# Altium PCB PowerSupplyV2.PcbDoc (part 2 of 4)
Units mm, origin at the board's own origin, x right, y up, seen from the top; angles counter-clockwise.
Board outline 28.17 x 37.01 mm, 2 copper layers (Top Layer, Bottom Layer), stack 0.971 mm thick; 117 components, 81 nets, 421 pads, 118 vias.
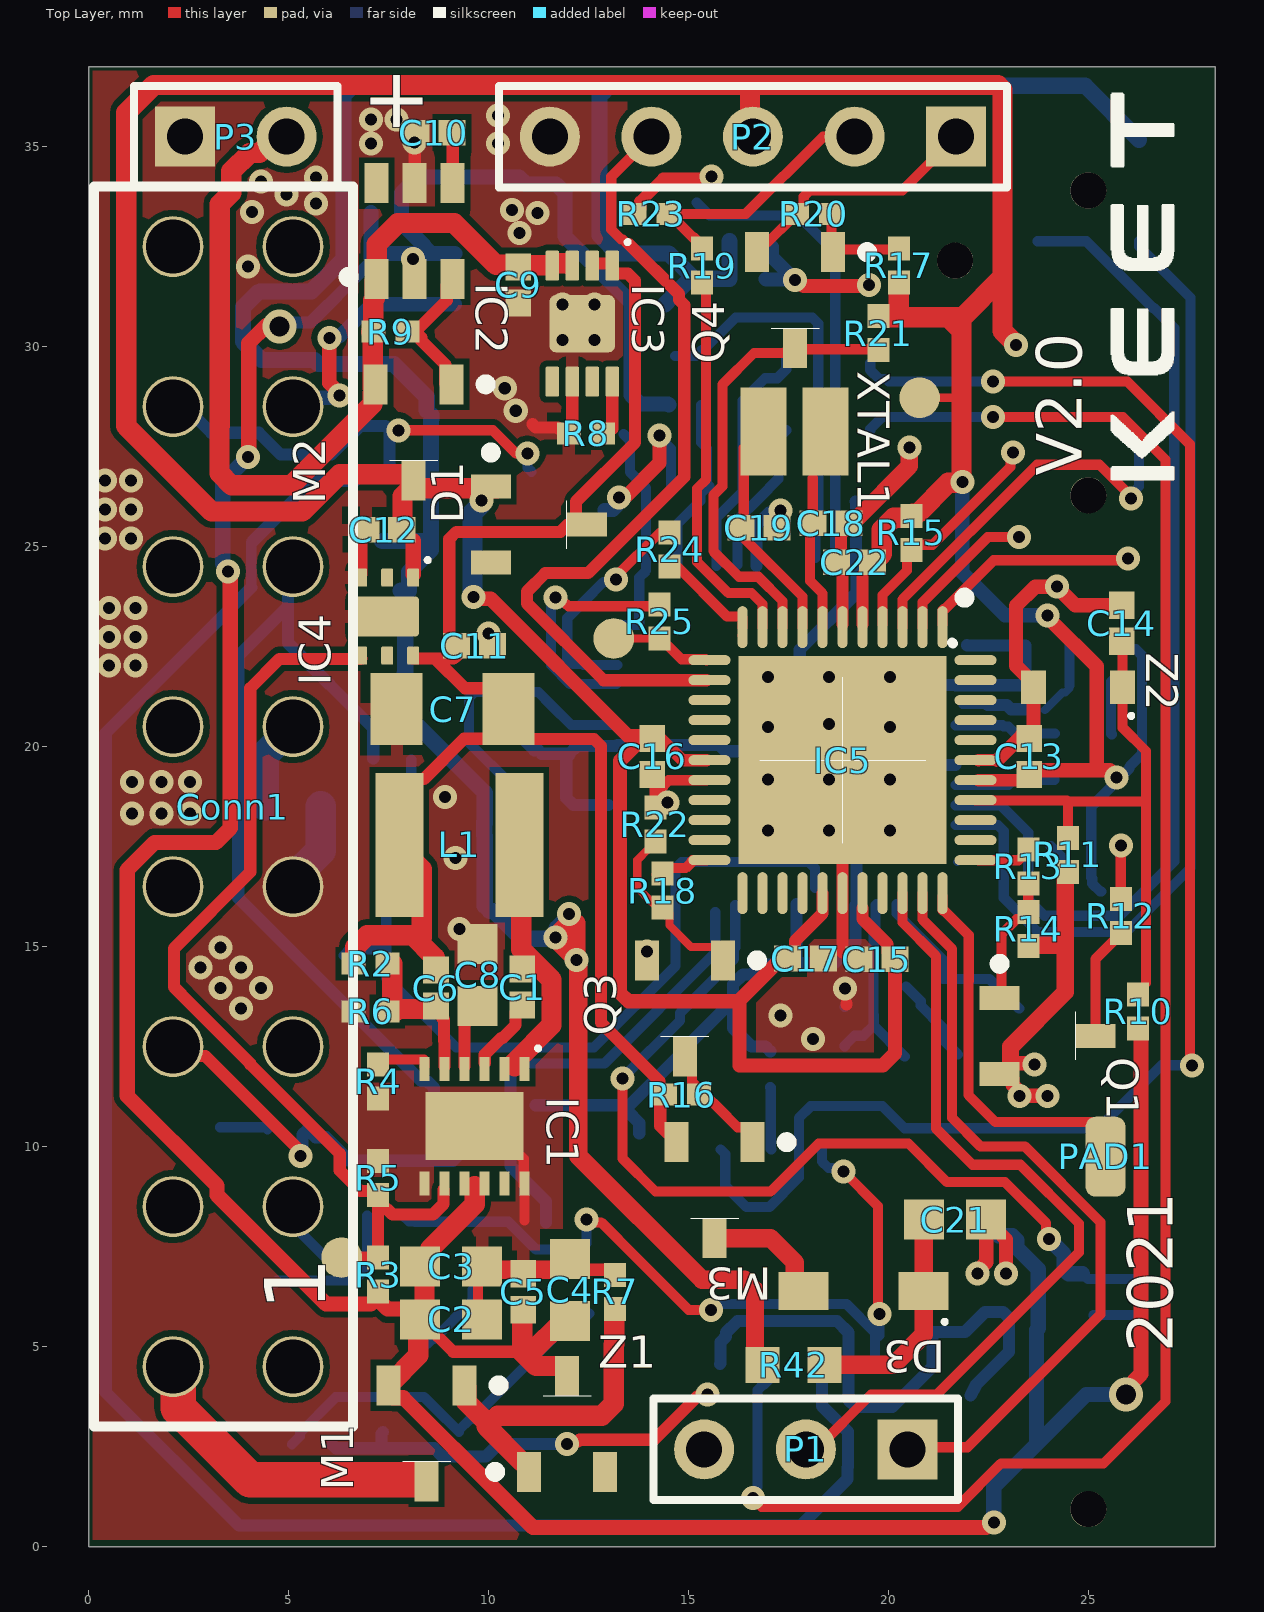
[diagram p0: Top Layer view]

## Part data (continued)
D2: library part BAT46W-7-F, "Diode Schottky 100V 0.15A 2Pin SOD123", Average Rectified Current=150mA, Forward Voltage=1V, Manufacturer=Diodes, Max Forward Surge Current (Ifsm)=750mA, Max Operating Temperature=125°C, Max Repetitive Reverse Voltage (Vrrm)=100V, Max Reverse Current=2uA, Min Operating Temperature=-55°C, Package Quantity=3000, Power Dissipation=200mW, Supplier Part Number 1=621-BAT46W-7-F, Category="Rectifier Diodes", ComponentLink1Description=https://datasheet.ciiva.com/4715/ds30044-73910-4715680.pdf?src-supplier=Mouser, ComponentLink1URL=https://datasheet.ciiva.com/4715/ds30044-73910-4715680.pdf?src-supplier=Mouser, ComponentLink2Description=https://datasheet.ciiva.com/8303/ds30044-8303137.pdf?src-supplier=Avnet, ComponentLink2URL=https://datasheet.ciiva.com/8303/ds30044-8303137.pdf?src-supplier=Avnet, ComponentLink3Description=https://datasheet.ciiva.com/6382/ds30044-6382981.pdf?src-supplier=Digi-Key, ComponentLink3URL=https://datasheet.ciiva.com/6382/ds30044-6382981.pdf?src-supplier=Digi-Key, ComponentLink4Description=https://datasheet.ciiva.com/16574/ds30044-16574286.pdf?src-supplier=Avnet+Europe, ComponentLink4URL=https://datasheet.ciiva.com/16574/ds30044-16574286.pdf?src-supplier=Avnet+Europe, ComponentLink5Description=https://datasheet.ciiva.com/16205/ds30044-16205030.pdf?src-supplier=Future+Electronics, ComponentLink5URL=https://datasheet.ciiva.com/16205/ds30044-16205030.pdf?src-supplier=Future+Electronics, ComponentLink6Description=https://datasheet.ciiva.com/22695/887886-22695798.pdf?src-supplier=Element14, ComponentLink6URL=https://datasheet.ciiva.com/22695/887886-22695798.pdf?src-supplier=Element14, ComponentLink7Description=https://datasheet.ciiva.com/6382/ds30044-6382983.pdf?src-supplier=Digi-Key, ComponentLink7URL=https://datasheet.ciiva.com/6382/ds30044-6382983.pdf?src-supplier=Digi-Key, ComponentLink8Description=https://datasheet.ciiva.com/6382/ds30044-6382985.pdf?src-supplier=Digi-Key, ComponentLink8URL=https://datasheet.ciiva.com/6382/ds30044-6382985.pdf?src-supplier=Digi-Key, ComponentLink9Description=https://datasheet.ciiva.com/15144/getdatasheetpartid-89219-15144635.pdf?src-supplier=Verical, ComponentLink9URL=https://datasheet.ciiva.com/15144/getdatasheetpartid-89219-15144635.pdf?src-supplier=Verical, ComponentLink10Description=https://datasheet.ciiva.com/1177/ds30044-1177855.pdf?src-supplier=Element14, ComponentLink10URL=https://datasheet.ciiva.com/1177/ds30044-1177855.pdf?src-supplier=Element14, Contact Plating=Tin,Matte, Element Configuration=Single, Forward Current=150mA, Height=1.25mm, Lead Free="Lead Free", Length=2.85mm, Manufacturer Part Number=BAT46W-7-F, Max Reverse Voltage (DC)=100V, Number of Pins=2, Packaging="Tape and Reel", Peak Non-Repetitive Surge Current=750mA, Power Rating=200mW, Pricing 1="1=0,370000, 10=0,245000, 50=0,245000, 100=0,133000, 1000=0,081000, 10000=0,056000 (USD)", Radiation Hardening=No, REACH SVHC="No SVHC", RoHS=Yes, RoHS Compliant=Yes, Series=-, Stock 1=53638, Supplier 1=Mouser, Weight=0.000353oz, Width=1.7mm
D3: "SCHOTTKY DIODE https://eu.mouser.com/datasheet/2/345/02ssl20l-02ssl40l-1107799.pdf"
IC1: library part LMR23615DRRR, "SIMPLE SWITCHER®, 36-V, 1.5-A Synchronous Step-Down Converter 12-SON -40 to 125", Manufacturer="Texas Instruments", Max Input Voltage=36V, Max Operating Temperature=125°C, Max Output Voltage=28V, Min Input Voltage=4V, Min Operating Temperature=-40°C, Min Output Voltage=1V, Output Current=1.5A, Supplier Part Number 1=595-LMR23615DRRR, Switching Frequency=2.425MHz, Category="Voltage Regulators - Switching", ComponentLink1Description=http://www.ti.com/lit/ds/symlink/lmr23615.pdf?src-supplier=Digi-Key, ComponentLink1URL=http://www.ti.com/lit/ds/symlink/lmr23615.pdf?src-supplier=Digi-Key, Features=UVLO, Manufacturer Part Number=LMR23615DRRR, Mount="Surface Mount", Number of Outputs=1, Output Configuration=Positive, Output Type=Adjustable, Packaging="Tape and Reel", Pricing 1="1=3,04000, 10=2,73000, 50=2,58000, 100=2,12000, 1000=1,53000, 10000=1,47000 (USD)", RoHS=Yes, RoHS Compliant=Yes, Stock 1=2047, Supplier 1=Mouser, Synchronous Rectifier=Yes
IC2: "Voltage detector", Case/Package=SOT-23-6, Manufacturer="ABLIC U.S.A.", Max Operating Temperature=85°C, Min Operating Temperature=-40°C, Number of Voltages Monitored=1, Supplier Part Number 1=628-S-1011EA0-M6T1U4, Threshold Voltage=10V, Category="Voltage Supervisors", ComponentLink1Description=https://www.ablic.com/en/doc/datasheet/voltage_detector/S1011_E.pdf?src-supplier=Digi-Key, ComponentLink1URL=https://www.ablic.com/en/doc/datasheet/voltage_detector/S1011_E.pdf?src-supplier=Digi-Key, Manufacturer Part Number=S-1011EA0-M6T1U4, Mount="Surface Mount", Packaging="Tape and Reel", Pricing 1="1=0,99000, 10=0,88300, 50=0,88300, 100=0,60400, 1000=0,41900, 10000=0,37000 (USD)", Reset="Active Low", RoHS=No, Stock 1=20, Supplier 1=Mouser, Type="Voltage Detector"
IC3: library part MCP73831T-2ACI/MC, "IC CONTROLLER LI-ION 4.2V 8DFN", Case/Package=DFN, Manufacturer=Microchip, Max Input Voltage=7V, Max Operating Temperature=85°C, Max Supply Voltage=6V, Min Operating Temperature=-40°C, Min Supply Voltage=3.75V, Operating Supply Current=510uA, Output Current=500mA, Output Voltage=4.2V, Package Quantity=3300, Supplier Part Number 1=579-MCP73831T-2ACIMC, Category="Battery Management", ComponentLink1Description=https://datasheet.ciiva.com/16466/21984e-16466086.pdf?src-supplier=Avnet+Asia, ComponentLink1URL=https://datasheet.ciiva.com/16466/21984e-16466086.pdf?src-supplier=Avnet+Asia, ComponentLink2Description=https://datasheet.ciiva.com/1933/21984e-1933405.pdf?src-supplier=Digi-Key, ComponentLink2URL=https://datasheet.ciiva.com/1933/21984e-1933405.pdf?src-supplier=Digi-Key, Contact Plating=Tin,Matte, Lead Free="Lead Free", Manufacturer Part Number=MCP73831T-2ACI/MC, Mount="Surface Mount", Number Of Channels=1, Number of Pins=8, Packaging="Tape and Reel", Pricing 1="1=0,62000, 10=0,62000, 50=0,51000, 100=0,47000, 1000=0,47000, 10000=0,47000 (USD)", Radiation Hardening=No, RoHS=Yes, RoHS Compliant=Yes, Series=MCP73831, Stock 1=5377, Supplier 1=Mouser
IC4: library part TLV75740PDRVR, "1-A, low-IQ, high-accuracy, low-dropout voltage regulator with enable 6-WSON -40 to 125", Manufacturer="Texas Instruments", Max Operating Temperature=125°C, Min Operating Temperature=-40°C, Supplier Part Number 1=595-TLV75740PDRVR, Category="Integrated Circuits (ICs)", ComponentLink1Description=http://www.ti.com/general/docs/suppproductinfo.tsp?distId=10&amp;gotoUrl=http%3A%2F%2Fwww.ti.com%2Flit%2Fgpn%2Ftlv757p&src-supplier=Digi-Key, ComponentLink1URL=http://www.ti.com/general/docs/suppproductinfo.tsp?distId=10&amp;gotoUrl=http%3A%2F%2Fwww.ti.com%2Flit%2Fgpn%2Ftlv757p&src-supplier=Digi-Key, Manufacturer Part Number=TLV75740PDRVR, Pricing 1="1=0,62000, 10=0,49000, 50=0,49000, 100=0,36400, 1000=0,21700, 10000=0,18000 (USD)", RoHS=Yes, RoHS Compliant=Yes, Stock 1=5343, Supplier 1=Mouser
IC5: library part ATMEGA1284P-MU, "MCU 8-bit ATmega AVR RISC 128KB Flash 2.5V/3.3V/5V 44-Pin VQFN EP", Case/Package="VQFN EP", Frequency=20MHz, Manufacturer="Microchip / Atmel", Max Operating Temperature=85°C, Max Supply Voltage=5.5V, Min Operating Temperature=-40°C, Min Supply Voltage=1.8V, Package Quantity=360, Supplier Part Number 1=556-ATMEGA1284P-MU, Category=Microcontrollers, ComponentLink1Description=https://datasheet.ciiva.com/4839/doc8272-71643-4839072.pdf?src-supplier=Mouser, ComponentLink1URL=https://datasheet.ciiva.com/4839/doc8272-71643-4839072.pdf?src-supplier=Mouser, ComponentLink2Description=https://datasheet.ciiva.com/26818/atmega1284p-mu-26818543.pdf?src-supplier=IIIC, ComponentLink2URL=https://datasheet.ciiva.com/26818/atmega1284p-mu-26818543.pdf?src-supplier=IIIC, ComponentLink3Description=https://datasheet.ciiva.com/9235/doc8272-9235016.pdf?src-supplier=Avnet, ComponentLink3URL=https://datasheet.ciiva.com/9235/doc8272-9235016.pdf?src-supplier=Avnet, ComponentLink4Description=https://datasheet.ciiva.com/1157/1712449-1157226.pdf?src-supplier=Element14, ComponentLink4URL=https://datasheet.ciiva.com/1157/1712449-1157226.pdf?src-supplier=Element14, ComponentLink5Description=https://datasheet.ciiva.com/24154/doc8272-24154058.pdf?src-supplier=Future+Electronics, ComponentLink5URL=https://datasheet.ciiva.com/24154/doc8272-24154058.pdf?src-supplier=Future+Electronics, ComponentLink6Description=https://datasheet.ciiva.com/15213/getdatasheetpartid-187398-15213067.pdf?src-supplier=Verical, ComponentLink6URL=https://datasheet.ciiva.com/15213/getdatasheetpartid-187398-15213067.pdf?src-supplier=Verical, Contact Plating=Tin,Matte, Core Architecture=AVR, Data Bus Width=8b, Height=0.95mm, Interface=SPI,USART,2-Wire,I2C,UART, Lead Free="Lead Free", Length=7.1mm, Manufacturer Part Number=ATMEGA1284P-MU, Max Frequency=20MHz, Memory Size=128KB, Memory Type=FLASH, Mount="Surface Mount", Number of ADC Channels=8, Number of I2C Channels=1, Number of I/Os=32, Number of Pins=44, Number of Programmable I/O=32, Number of PWM Channels=6, Number of SPI Channels=1, Number of Timers/Counters=3, Oscillator Type=Internal, Packaging=Tray, Peripherals="Brown-out Detect/Reset,POR,PWM,WDT", Pricing 1="1=5,55000, 10=5,55000, 50=5,09000, 100=4,61000, 1000=4,61000, 10000=4,61000 (USD)", Radiation Hardening=No, RAM Size=16KB, REACH SVHC="No SVHC", RoHS=Yes, RoHS Compliant=Yes, Series="AVR® ATmega", Stock 1=90, Supplier 1=Mouser, Watchdog Timer=Yes, Width=7.1mm
IC6: library part LPC1517JBD48E, "IC MCU 32BIT 64KB FLASH 48LQFP", Case/Package=LQFP, Frequency=72MHz, Manufacturer="NXP Semiconductors", Max Operating Temperature=105°C, Max Power Dissipation=1.5W, Max Supply Voltage=3.6V, Min Operating Temperature=-40°C, Min Supply Voltage=2.4V, Operating Supply Voltage=3.3V, Package Quantity=250, Supplier Part Number 1=771-LPC1517JBD48E, Category=Microcontrollers, ComponentLink1Description=https://datasheet.ciiva.com/29718/lpc15xx-29718830.pdf?src-supplier=Digi-Key, ComponentLink1URL=https://datasheet.ciiva.com/29718/lpc15xx-29718830.pdf?src-supplier=Digi-Key, Core Architecture=ARM, Data Bus Width=32b, Interface=I2C,SPI,CAN,USART,UART, Lead Free="Lead Free", Manufacturer Part Number=LPC1517JBD48E, Max Frequency=72MHz, Memory Size=64KB, Memory Type=FLASH, Mount="Surface Mount", Number of ADC Channels=16, Number of I/Os=32, Number of Pins=48, Number of Programmable I/O=32, Number of Timers/Counters=4, Oscillator Type=Internal, Packaging=Tray, Peripherals="Brown-out Detect/Reset,POR,PWM,WDT,DMA", Pricing 1="1=5,33000, 10=4,52000, 50=4,52000, 100=3,72000, 1000=2,81000, 10000=2,81000 (USD)", Radiation Hardening=No, RAM Size=12KB, REACH SVHC="No SVHC", RoHS=Yes, RoHS Compliant=Yes, Supplier 1=Mouser, Watchdog Timer=Yes, Weight=6.287584oz
IC7: library part TJF1051T/3,118, "IC CAN TRANSEIVER HS 8SOIC", Case/Package=SO, Manufacturer="NXP Semiconductors", Max Operating Temperature=85°C, Max Supply Voltage=5.5V, Min Operating Temperature=-40°C, Min Supply Voltage=4.5V, Nominal Supply Current=70mA, Operating Supply Voltage=5V, Package Quantity=2500, Supplier Part Number 1=771-TJF1051T3118, Category="Interface ICs", ComponentLink1Description=https://datasheet.ciiva.com/1767/tjf1051-1767282.pdf?src-supplier=Digi-Key, ComponentLink1URL=https://datasheet.ciiva.com/1767/tjf1051-1767282.pdf?src-supplier=Digi-Key, ComponentLink2Description=https://datasheet.ciiva.com/11212/tjf1051-11212991.pdf?src-supplier=Avnet, ComponentLink2URL=https://datasheet.ciiva.com/11212/tjf1051-11212991.pdf?src-supplier=Avnet, Data Rate=1Mbps, Lead Free="Lead Free", Manufacturer Part Number=TJF1051T/3,118, Mount="Surface Mount", Number of Pins=8, Number of Transceivers=1, Number of Transmitters=1, Packaging="Tape and Reel", Pricing 1="1=1,03000, 10=0,87100, 50=0,87100, 100=0,59200, 1000=0,43600, 10000=0,41300 (USD)", Propagation Delay=220ns, Radiation Hardening=No, Receiver Hysteresis=120mV, RoHS=Yes, RoHS Compliant=Yes, Series=-, Simplex/Duplex="Half Duplex", Supplier 1=Mouser, Supply Current=70mA, Turn-On Delay Time=220ns
IC8: library part AP7313-33SRG-7, "IC REG LIN 3.3V 150MA SOT23R-3", Case/Package=TO-236-3, Dropout Voltage=150mV, Manufacturer=Diodes, Max Input Voltage=6V, Max Operating Temperature=85°C, Max Output Current=150mA, Max Power Dissipation=600mW, Min Current Limit=200mA, Min Input Voltage=2V, Min Operating Temperature=-40°C, Min Output Voltage=3.3V, Package Quantity=3000, Power Dissipation=540W, Quiescent Current=75uA, Supplier Part Number 1=621-AP7313-33SRG-7, Accuracy=2%, Category="Voltage Regulators - Linear", ComponentLink1Description=https://datasheet.ciiva.com/26856/getdatasheetpartid-656981-26856375.pdf?src-supplier=Verical, ComponentLink1URL=https://datasheet.ciiva.com/26856/getdatasheetpartid-656981-26856375.pdf?src-supplier=Verical, ComponentLink2Description=https://datasheet.ciiva.com/16415/ap7313-16415567.pdf?src-supplier=Future+Electronics, ComponentLink2URL=https://datasheet.ciiva.com/16415/ap7313-16415567.pdf?src-supplier=Future+Electronics, Height=1mm, Lead Free="Lead Free", Length=3mm, Manufacturer Part Number=AP7313-33SRG-7, Mount="Surface Mount", Number of Outputs=1, Number of Pins=3, Number of Regulators=1, Output Current=150mA, Output Type=Fixed, Output Voltage=3.3V, Packaging="Tape and Reel", Polarity=Positive, Pricing 1="1=0,35000, 10=0,26100, 50=0,26100, 100=0,13400, 1000=0,10000, 10000=0,10000 (USD)", Radiation Hardening=No, REACH SVHC="No SVHC", RoHS=Yes, RoHS Compliant=Yes, Series=AP7313, Stock 1=3794, Supplier 1=Mouser, Weight=0.000282oz, Width=1.4mm
IC9: library part TLV76050DBZT, "IC REG LINEAR 5V 100MA SOT23-3", Case/Package=TO-236-3, Dropout Voltage=1.1V, Manufacturer="Texas Instruments", Max Input Voltage=30V, Max Operating Temperature=125°C, Min Operating Temperature=-40°C, Output Current=100mA, Quiescent Current=5mA, Supplier Part Number 1=595-TLV76050DBZT, Category="Voltage Regulators - Linear", ComponentLink1Description=http://www.ti.com/general/docs/lit/getliterature.tsp?genericPartNumber=TLV760&fileType=pdf&src-supplier=Farnell, ComponentLink1URL=http://www.ti.com/general/docs/lit/getliterature.tsp?genericPartNumber=TLV760&fileType=pdf&src-supplier=Farnell, ComponentLink2Description=http://www.ti.com/lit/ds/symlink/tlv760.pdf?src-supplier=Digi-Key, ComponentLink2URL=http://www.ti.com/lit/ds/symlink/tlv760.pdf?src-supplier=Digi-Key, Manufacturer Part Number=TLV76050DBZT, Min Output Voltage=5V, Mount="Surface Mount", Number of Regulators=1, Output Configuration=Positive, Output Type=Fixed, Packaging="Tape and Reel", RoHS=Yes, RoHS Compliant=Yes, Supplier 1=Mouser
IC10: library part LM393D, "TEXAS INSTRUMENTS - LM393D - COMPARATOR DUAL, SMD, SOIC8, 393", Case/Package=SOIC, Dual Supply Voltage=9V, Input Bias Current=250nA, Input Offset Voltage (Vos)=5mV, Manufacturer="Texas Instruments", Max Dual Supply Voltage=18V, Max Operating Temperature=70°C, Max Supply Current=500uA, Max Supply Voltage=36V, Min Dual Supply Voltage=1V, Min Operating Temperature=0°C, Min Supply Voltage=2V, Nominal Supply Current=1mA, Operating Supply Voltage=28V, Output Current=20mA, Output Current Per Channel=6mA, Package Quantity=75, Quiescent Current=2.5mA, Supplier Part Number 1=595-LM393D, Voltage Gain=106.02dB, Category="Amplifiers - Op Amps, Buffer, Instrumentation", ComponentLink1Description=https://datasheet.ciiva.com/15131/getdatasheetpartid-248499-15131100.pdf?src-supplier=Verical, ComponentLink1URL=https://datasheet.ciiva.com/15131/getdatasheetpartid-248499-15131100.pdf?src-supplier=Verical, ComponentLink2Description=https://datasheet.ciiva.com/2970/lm2903-2970514.pdf?src-supplier=Avnet, ComponentLink2URL=https://datasheet.ciiva.com/2970/lm2903-2970514.pdf?src-supplier=Avnet, ComponentLink3Description=https://datasheet.ciiva.com/1827/lm193-1827528.pdf?src-supplier=Digi-Key, ComponentLink3URL=https://datasheet.ciiva.com/1827/lm193-1827528.pdf?src-supplier=Digi-Key, ComponentLink4Description=https://datasheet.ciiva.com/1483/1633629-1483065.pdf?src-supplier=Element14, ComponentLink4URL=https://datasheet.ciiva.com/1483/1633629-1483065.pdf?src-supplier=Element14, ComponentLink5Description=https://datasheet.ciiva.com/16464/lm2903-16464313.pdf?src-supplier=Avnet+Asia, ComponentLink5URL=https://datasheet.ciiva.com/16464/lm2903-16464313.pdf?src-supplier=Avnet+Asia, Contact Plating=Gold, Height=1.58mm, Lead Free="Lead Free", Length=4.9mm, Manufacturer Part Number=LM393D, Mount="Surface Mount", Number Of Channels=2, Number of Elements=2, Number of Pins=8, Output Type=TTL, Packaging=Rail/Tube, Pricing 1="1=0,44000, 10=0,32700, 50=0,32700, 100=0,18200, 1000=0,12500, 10000=0,11700 (USD)", Radiation Hardening=No, REACH SVHC="No SVHC", Response Time=0.3us, RoHS=Yes, RoHS Compliant=Yes, Stock 1=7555, Supplier 1=Mouser, Weight=0.002561oz, Width=3.91mm
L1: library part IFSC1515AHER4R7M01, "Inductor Power Shielded Wirewound 4.7uH 20% 100KHz 2.2A 90mOhm DCR 1515 T/R", Case/Package=1515, Current Rating=2.2A, DC Resistance (DCR)=90mR, Inductance=4.7uH, Inductance Tolerance=20%, Manufacturer="Vishay Dale", Max DC Current=2A, Max Operating Temperature=125°C, Min Operating Temperature=-55°C, Package Quantity=2000, Supplier Part Number 1=70-IFSC1515AHER4R7M0, Test Frequency=100kHz, Category="Fixed Inductors", ComponentLink1Description=https://datasheet.ciiva.com/1049/sc15ah01-1049410.pdf?src-supplier=Digi-Key, ComponentLink1URL=https://datasheet.ciiva.com/1049/sc15ah01-1049410.pdf?src-supplier=Digi-Key, ComponentLink2Description=https://datasheet.ciiva.com/1049/sc15ah01-1049411.pdf?src-supplier=Digi-Key, ComponentLink2URL=https://datasheet.ciiva.com/1049/sc15ah01-1049411.pdf?src-supplier=Digi-Key, ComponentLink3Description=https://datasheet.ciiva.com/1049/sc15ah01-1049412.pdf?src-supplier=Digi-Key, ComponentLink3URL=https://datasheet.ciiva.com/1049/sc15ah01-1049412.pdf?src-supplier=Digi-Key, ComponentLink4Description=https://datasheet.ciiva.com/46395/1913058-46395302.pdf?src-supplier=Element14, ComponentLink4URL=https://datasheet.ciiva.com/46395/1913058-46395302.pdf?src-supplier=Element14, ComponentLink5Description=https://datasheet.ciiva.com/8494/sc15ah01-8494793.pdf?src-supplier=Avnet, ComponentLink5URL=https://datasheet.ciiva.com/8494/sc15ah01-8494793.pdf?src-supplier=Avnet, ComponentLink6Description=https://datasheet.ciiva.com/8017/sc15ah01-8017548.pdf?src-supplier=Element14, ComponentLink6URL=https://datasheet.ciiva.com/8017/sc15ah01-8017548.pdf?src-supplier=Element14, ComponentLink7Description=https://datasheet.ciiva.com/22726/1730404-22726061.pdf?src-supplier=Element14, ComponentLink7URL=https://datasheet.ciiva.com/22726/1730404-22726061.pdf?src-supplier=Element14, Depth=4mm, Height=1.8mm, Height - Seated (Max)=0.075inch, Lead Free="Lead Free", Length=0.15inch, Manufacturer Part Number=IFSC1515AHER4R7M01, Military Standard=Not, Mount="Surface Mount", Number of Pins=2, Packaging="Tape and Reel", Pricing 1="1=0,64000, 10=0,55900, 50=0,55900, 100=0,33500, 1000=0,26800, 10000=0,20300 (USD)", REACH SVHC=Unknown, RMS Current (Irms)=2.2A, RoHS=Yes, RoHS Compliant=Yes, Saturation Current=2A, Series=IFSC-1515AH-01, Shielding=Shielded, Stock 1=16855, Supplier 1=Mouser, Termination=SMD/SMT, Tolerance=20%, Width=0.15inch
LED1: library part 150060RS75000, "WURTH ELEKTRONIK - 150060RS75000 - LED, Red, 625 nm, 2 V, 30 mA, 250 mcd RoHS Compliant: Yes", Case Code (Imperial)=0603, Case Code (Metric)=1608, Color=Red, Forward Current=30mA, Forward Voltage=2V, Manufacturer="Wurth Electronics", Max Operating Temperature=85°C, Min Operating Temperature=-40°C, Package Quantity=1, Supplier Part Number 1=710-150060RS75000, Test Current=20mA, Case/Package=0603, Category=LEDs, ComponentLink1Description=https://datasheet.ciiva.com/29563/150060rs75000-29563040.pdf?src-supplier=Digi-Key, ComponentLink1URL=https://datasheet.ciiva.com/29563/150060rs75000-29563040.pdf?src-supplier=Digi-Key, ComponentLink2Description=https://datasheet.ciiva.com/29279/759428-da-01-en-chipled-0603-w-kl-rot-150060rs75000-29279196.pdf?src-supplier=Conrad, ComponentLink2URL=https://datasheet.ciiva.com/29279/759428-da-01-en-chipled-0603-w-kl-rot-150060rs75000-29279196.pdf?src-supplier=Conrad, Dominant Wavelength=625nm, Height=0.7mm, Length=1.6mm, Lens Style=Clear,Rectangular, Luminous Intensity=250mcd, Manufacturer Part Number=150060RS75000, Mount="Surface Mount", Packaging="Cut Tape", Pricing 1="1=0,15000, 10=0,15000, 50=0,13300, 100=0,11400, 1000=0,10600, 10000=0,10600 (USD)", REACH SVHC=Unknown, RoHS=Yes, RoHS Compliant=Yes, Stock 1=64382, Supplier 1=Mouser, Viewing Angle=140°, Wavelength=625nm, Width=0.8mm
LED2: library part HSMS-C190, "AVAGO TECHNOLOGIES - HSMS-C190 - LED, RED, 10MCD, 626NM", Case Code (Imperial)=0603, Case Code (Metric)=1608, Color=Red, Forward Current=20mA, Forward Voltage=2.1V, Lens Color=White, Manufacturer="Broadcom Avago", Max Operating Temperature=85°C, Min Operating Temperature=-40°C, Package Quantity=4000, Power Dissipation=52mW, Reverse Voltage=5V, Supplier Part Number 1=630-HSMS-C190, Case/Package=0603, Category=LEDs, Depth=0.8mm, Dominant Wavelength=626nm, Height=0.8mm, Illumination Color=Red, Lead Free="Lead Free", Length=1.6mm, Lens Style=Diffused,Colorless,Rectangular, Lens Transparency=Diffused, Luminous Intensity=10mcd, Manufacturer Part Number=HSMS-C190, Mount="Surface Mount", Number of Elements=1, Number of LEDs=1, Number of Pins=2, Packaging="Tape and Reel", Power Rating=52mW, Pricing 1="1=0,41000, 10=0,28800, 50=0,28800, 100=0,12800, 1000=0,09400, 10000=0,06400 (USD)", Radiation Hardening=No, REACH SVHC="No SVHC", RoHS=Yes, RoHS Compliant=Yes, Series=-, Stock 1=51818, Supplier 1=Mouser, Test Current=20mA, Viewing Angle=170°, Wavelength=626nm, Width=0.8mm
LED3: library part HSMY-C190, "LED, YELLOW, 8MCD, 586NM; LED Colour:Yellow; Bulb Size:-; Wavelength Typ:586nm; Forward Voltage:2.1V; Forward Current If:20mA; Luminous Intensity:8mcd; LED Mounting:SMD; Lens Shape:Rectangular; Viewing Angle:170 ; Packaging:Cut Tape;;RoHS Compliant: Yes", Case Code (Imperial)=0603, Case Code (Metric)=1608, Forward Current=20mA, Forward Voltage=2.1V, Lens Color=White, Manufacturer="Broadcom Avago", Max Operating Temperature=85°C, Max Power Dissipation=52mW, Min Operating Temperature=-40°C, Package Quantity=1, Reverse Voltage=5V, Supplier Part Number 1=630-HSMY-C190, Case/Package=0603, Category=LEDs, Color=Yellow, ComponentLink1Description=https://datasheet.ciiva.com/34302/1557097-34302483.pdf?src-supplier=Jameco, ComponentLink1URL=https://datasheet.ciiva.com/34302/1557097-34302483.pdf?src-supplier=Jameco, ComponentLink2Description=https://datasheet.ciiva.com/15117/getdatasheetpartid-118294-15117593.pdf?src-supplier=Verical, ComponentLink2URL=https://datasheet.ciiva.com/15117/getdatasheetpartid-118294-15117593.pdf?src-supplier=Verical, ComponentLink3Description=https://datasheet.ciiva.com/11774/0900766b80ad69c9-11774266.pdf?src-supplier=RSComponents, ComponentLink3URL=https://datasheet.ciiva.com/11774/0900766b80ad69c9-11774266.pdf?src-supplier=RSComponents, ComponentLink4Description=https://datasheet.ciiva.com/29280/180660-da-01-en-chip-led-hsmy-c190-gelb-29280613.pdf?src-supplier=Conrad, ComponentLink4URL=https://datasheet.ciiva.com/29280/180660-da-01-en-chip-led-hsmy-c190-gelb-29280613.pdf?src-supplier=Conrad, ComponentLink5Description=https://datasheet.ciiva.com/14172/swseriehsmx-c150toc190-e-14172172.pdf?src-supplier=Distrelec, ComponentLink5URL=https://datasheet.ciiva.com/14172/swseriehsmx-c150toc190-e-14172172.pdf?src-supplier=Distrelec, Contact Plating=Gold, Depth=0.8mm, Dominant Wavelength=586nm, Height=0.8mm, Illumination Color=Yellow, Lead Free="Lead Free", Length=1.6mm, Lens Style=Rectangular,Untinted,Diffused,Colorless, Lens Transparency=Diffused, Luminous Intensity=8mcd, Manufacturer Part Number=HSMY-C190, Mount="Surface Mount", Number of Elements=1, Number of LEDs=1, Number of Pins=2, Number of Terminals/Pins=2, Packaging="Tape and Reel", Power Dissipation=52mW, Power Rating=52mW, Pricing 1="1=0,41000, 10=0,28800, 50=0,28800, 100=0,12800, 1000=0,09400, 10000=0,06400 (USD)", Radiation Hardening=No, REACH SVHC="No SVHC", RoHS=Yes, RoHS Compliant=Yes, Series=-, Shape=Rectangular, Stock 1=44023, Supplier 1=Mouser, Test Current=20mA, Viewing Angle=170°, Wavelength=586nm, Width=0.8mm
M1: library part DMPH6250SQ-7, "DMPH6250SQ Series 60 V 2.4 A P-Channel Enhancement Mode Mosfet - SOT-23-3", Manufacturer=Diodes, Supplier Part Number 1=621-DMPH6250SQ-7, Manufacturer Part Number=DMPH6250SQ-7, Pricing 1="1=0,40000, 10=0,31900, 50=0,31900, 100=0,22500, 1000=0,15100, 10000=0,13000 (USD)", RoHS=Yes, Supplier 1=Mouser
M2 M3: library part DMP1045U-7, "P-Channel 12 V 31 mOhm Surface Mount Enhancement Mode Mosfet - SOT-23-3", Case/Package=SOT-23, Continuous Drain Current (ID)=4A, Drain To Source Breakdown Voltage=-12V, Drain To Source Resistance=31mR, Drain to Source Voltage (Vdss)=12V, Gate to Source Voltage (Vgs)=8V, Input Capacitance=1.357nF, Manufacturer=Diodes, Max Operating Temperature=150°C, Max Power Dissipation=800mW, Min Operating Temperature=-55°C, Package Quantity=3000, Power Dissipation=1.3W, Supplier Part Number 1=621-DMP1045U-7, Category=MOSFETs, ComponentLink1Description=https://datasheet.ciiva.com/11176/dmp1045u-11176581.pdf?src-supplier=Avnet, ComponentLink1URL=https://datasheet.ciiva.com/11176/dmp1045u-11176581.pdf?src-supplier=Avnet, ComponentLink2Description=https://datasheet.ciiva.com/17323/dmp1045u-17323644.pdf?src-supplier=Avnet+Europe, ComponentLink2URL=https://datasheet.ciiva.com/17323/dmp1045u-17323644.pdf?src-supplier=Avnet+Europe, ComponentLink3Description=https://datasheet.ciiva.com/18648/dmp1045u-18648300.pdf?src-supplier=Digi-Key, ComponentLink3URL=https://datasheet.ciiva.com/18648/dmp1045u-18648300.pdf?src-supplier=Digi-Key, Contact Plating=Tin,Matte, Element Configuration=Single, Fall Time=106.9ns, Height=1.1mm, Lead Free="Lead Free", Length=3mm, Manufacturer Part Number=DMP1045U-7, Mount="Surface Mount", Number Of Channels=1, Number of Elements=1, Number of Pins=3, Packaging="Tape and Reel", Polarity=P-CHANNEL, Pricing 1="1=0,41000, 10=0,27800, 50=0,27800, 100=0,14500, 1000=0,10100, 10000=0,07800 (USD)", Radiation Hardening=No, Rds On Max=31mR, REACH SVHC="No SVHC", Rise Time=23.3ns, RoHS=Yes, RoHS Compliant=Yes, Series=DMP1045, Stock 1=8272, Supplier 1=Mouser, Turn-Off Delay Time=91.2ns, Turn-On Delay Time=15.7ns, Weight=0.000282oz, Width=1.4mm
P1: "Header, 3-Pin", LatestRevisionDate=17-Jul-2002, LatestRevisionNote="Re-released for DXP Platform.", Publisher="Altium Limited"
P2: "Header, 5-Pin", LatestRevisionDate=17-Jul-2002, LatestRevisionNote="Re-released for DXP Platform.", Publisher="Altium Limited"
P3: "Header, 2-Pin", LatestRevisionDate=17-Jul-2002, LatestRevisionNote="Re-released for DXP Platform.", Publisher="Altium Limited"
PAD1: library part PAD, "just a pad"
pogo1: "pad layout for external pogo connector"
Q1 Q3 Q4: library part BC850CLT1G, "ON SEMICONDUCTOR   BC850CLT1G   BIPOLAR TRANSISTOR, NPN, 45V SOT-23", Case/Package=SOT-23-3, Collector Base Voltage (VCBO)=50V, Collector Emitter Breakdown Voltage=45V, Collector Emitter Saturation Voltage=600mV, Current Rating=100mA, Emitter Base Voltage (VEBO)=6V, Frequency=100MHz, Manufacturer="ON Semiconductor", Max Operating Temperature=150°C, Max Power Dissipation=225mW, Min Operating Temperature=-55°C, Package Quantity=1, Power Dissipation=300mW, Supplier Part Number 1=863-BC850CLT1G, Category=BJTs, Collector Emitter Voltage (VCEO)=45V, Collector-emitter Voltage-Max=600mV, ComponentLink1Description=https://datasheet.ciiva.com/976/bc846alt1-d-976401.pdf?src-supplier=Digi-Key, ComponentLink1URL=https://datasheet.ciiva.com/976/bc846alt1-d-976401.pdf?src-supplier=Digi-Key, ComponentLink2Description=https://datasheet.ciiva.com/976/bc846alt1-d-976402.pdf?src-supplier=Digi-Key, ComponentLink2URL=https://datasheet.ciiva.com/976/bc846alt1-d-976402.pdf?src-supplier=Digi-Key, ComponentLink3Description=https://datasheet.ciiva.com/976/bc846alt1-d-976403.pdf?src-supplier=Digi-Key, ComponentLink3URL=https://datasheet.ciiva.com/976/bc846alt1-d-976403.pdf?src-supplier=Digi-Key, ComponentLink4Description=https://datasheet.ciiva.com/7971/1571861-7971973.pdf?src-supplier=Element14, ComponentLink4URL=https://datasheet.ciiva.com/7971/1571861-7971973.pdf?src-supplier=Element14, ComponentLink5Description=https://datasheet.ciiva.com/11204/bc846alt1-d-11204376.pdf?src-supplier=Avnet, ComponentLink5URL=https://datasheet.ciiva.com/11204/bc846alt1-d-11204376.pdf?src-supplier=Avnet, ComponentLink6Description=https://datasheet.ciiva.com/25997/bc846alt1-d-25997003.pdf?src-supplier=Avnet+Europe, ComponentLink6URL=https://datasheet.ciiva.com/25997/bc846alt1-d-25997003.pdf?src-supplier=Avnet+Europe, ComponentLink7Description=https://datasheet.ciiva.com/7972/bc846alt1-d-7972206.pdf?src-supplier=Element14, ComponentLink7URL=https://datasheet.ciiva.com/7972/bc846alt1-d-7972206.pdf?src-supplier=Element14, ComponentLink8Description=https://datasheet.ciiva.com/16291/bc846alt1-d-16291503.pdf?src-supplier=Future+Electronics, ComponentLink8URL=https://datasheet.ciiva.com/16291/bc846alt1-d-16291503.pdf?src-supplier=Future+Electronics, Contact Plating=Tin,Matte, Element Configuration=Single, Gain Bandwidth Product=100MHz, Height=0.94mm, hFE Min=420, Lead Free="Lead Free", Length=2.9mm, Manufacturer Part Number=BC850CLT1G, Max Breakdown Voltage=45V, Max Collector Current=100mA, Max Frequency=100MHz, Number of Elements=1, Number of Pins=3, Packaging="Tape and Reel", Polarity=NPN, Pricing 1="1=0,11000, 10=0,09800, 50=0,09800, 100=0,03400, 1000=0,02400, 10000=0,01500 (USD)", Radiation Hardening=No, REACH SVHC="No SVHC", RoHS=Yes, RoHS Compliant=Yes, Series=-, Stock 1=123785, Supplier 1=Mouser, Transition Frequency=100MHz, Voltage Rating (DC)=45V, Width=1.3mm
Q2 Q6: library part BSS138, "Trans MOSFET N-CH 50V 0.22A 3-Pin SOT-23 T/R", Case/Package=SOT-23, Continuous Drain Current (ID)=220mA, Drain To Source Breakdown Voltage=50V, Drain To Source Resistance=3.5R, Gate to Source Voltage (Vgs)=20V, Input Capacitance=27pF, Manufacturer="ON Semiconductor / Fairchild", Max Operating Temperature=150°C, Max Power Dissipation=360mW, Min Operating Temperature=-55°C, On-State Resistance=6R, Package Quantity=1, Supplier Part Number 1=512-BSS138, Threshold Voltage=1.3V, Category=MOSFETs, ComponentLink1Description=https://datasheet.ciiva.com/1190/193736-1190130.pdf?src-supplier=Element14, ComponentLink1URL=https://datasheet.ciiva.com/1190/193736-1190130.pdf?src-supplier=Element14, ComponentLink2Description=https://datasheet.ciiva.com/931/bss138-931776.pdf?src-supplier=Digi-Key, ComponentLink2URL=https://datasheet.ciiva.com/931/bss138-931776.pdf?src-supplier=Digi-Key, ComponentLink3Description=https://datasheet.ciiva.com/1190/193736-1190131.pdf?src-supplier=Element14, ComponentLink3URL=https://datasheet.ciiva.com/1190/193736-1190131.pdf?src-supplier=Element14, ComponentLink4Description=https://datasheet.ciiva.com/1254/193736-1254983.pdf?src-supplier=Newark, ComponentLink4URL=https://datasheet.ciiva.com/1254/193736-1254983.pdf?src-supplier=Newark, ComponentLink5Description=https://datasheet.ciiva.com/22655/193736-22655240.pdf?src-supplier=Element14, ComponentLink5URL=https://datasheet.ciiva.com/22655/193736-22655240.pdf?src-supplier=Element14, ComponentLink6Description=https://datasheet.ciiva.com/26229/bss138-26229007.pdf?src-supplier=Avnet+Europe, ComponentLink6URL=https://datasheet.ciiva.com/26229/bss138-26229007.pdf?src-supplier=Avnet+Europe, ComponentLink7Description=https://datasheet.ciiva.com/3304/bss138-3304424.pdf?src-supplier=Avnet, ComponentLink7URL=https://datasheet.ciiva.com/3304/bss138-3304424.pdf?src-supplier=Avnet, ComponentLink8Description=https://datasheet.ciiva.com/16834/bss138-16834843.pdf?src-supplier=Future+Electronics, ComponentLink8URL=https://datasheet.ciiva.com/16834/bss138-16834843.pdf?src-supplier=Future+Electronics, ComponentLink9Description=https://datasheet.ciiva.com/27050/784896-27050043.pdf?src-supplier=Jameco, ComponentLink9URL=https://datasheet.ciiva.com/27050/784896-27050043.pdf?src-supplier=Jameco, Contact Plating=Tin,Matte, Current Rating=220mA, Drain to Source Voltage (Vdss)=50V, Dual Supply Voltage=50V, Element Configuration=Single, Fall Time=9ns, Height=0.93mm, Lead Free="Lead Free", Length=2.92mm, Manufacturer Part Number=BSS138, Mount="Surface Mount", Nominal Vgs=1.3V, Number of Elements=1, Number of Pins=3, Packaging="Tape and Reel", Power Dissipation=360mW, Pricing 1="1=0,26000, 10=0,18000, 50=0,18000, 100=0,07300, 1000=0,05100, 10000=0,03300 (USD)", Radiation Hardening=No, Rds On Max=3.5R, REACH SVHC="No SVHC", Rise Time=9ns, RoHS=Yes, Stock 1=226455, Supplier 1=Mouser, Termination=SMD/SMT, Turn-Off Delay Time=20ns, Turn-On Delay Time=2.5ns, Voltage Rating (DC)=50V, Weight=0.03g, Width=1.3mm
Q5: library part BSS84LT1G, "On a Reel of 3000, P-Channel MOSFET, 130 mA, 50 V, 3-Pin SOT-23 ON Semiconductor BSS84LT1G", Case/Package=SOT-23-3, Continuous Drain Current (ID)=130mA, Current Rating=-130mA, Drain To Source Breakdown Voltage=50V, Drain To Source Resistance=10R, Gate to Source Voltage (Vgs)=20V, Input Capacitance=30pF, Manufacturer="ON Semiconductor", Max Operating Temperature=150°C, Max Power Dissipation=225mW, Min Operating Temperature=-55°C, Package Quantity=1, Supplier Part Number 1=863-BSS84LT1G, Threshold Voltage=-2V, Voltage Rating (DC)=-50V, Category=MOSFETs, ComponentLink1Description=https://datasheet.ciiva.com/1190/86068-1190258.pdf?src-supplier=Element14, ComponentLink1URL=https://datasheet.ciiva.com/1190/86068-1190258.pdf?src-supplier=Element14, ComponentLink2Description=https://datasheet.ciiva.com/1255/1747989-1255091.pdf?src-supplier=Newark, ComponentLink2URL=https://datasheet.ciiva.com/1255/1747989-1255091.pdf?src-supplier=Newark, ComponentLink3Description=https://datasheet.ciiva.com/15198/getdatasheetpartid-86905-15198910.pdf?src-supplier=Verical, ComponentLink3URL=https://datasheet.ciiva.com/15198/getdatasheetpartid-86905-15198910.pdf?src-supplier=Verical, ComponentLink4Description=https://datasheet.ciiva.com/1190/86068-1190259.pdf?src-supplier=Element14, ComponentLink4URL=https://datasheet.ciiva.com/1190/86068-1190259.pdf?src-supplier=Element14, ComponentLink5Description=https://datasheet.ciiva.com/27054/1920992-27054773.pdf?src-supplier=Jameco, ComponentLink5URL=https://datasheet.ciiva.com/27054/1920992-27054773.pdf?src-supplier=Jameco, ComponentLink6Description=https://datasheet.ciiva.com/26146/bss84lt1-d-26146231.pdf?src-supplier=Avnet+Europe, ComponentLink6URL=https://datasheet.ciiva.com/26146/bss84lt1-d-26146231.pdf?src-supplier=Avnet+Europe, ComponentLink7Description=https://datasheet.ciiva.com/16335/bss84lt1-d-16335336.pdf?src-supplier=Future+Electronics, ComponentLink7URL=https://datasheet.ciiva.com/16335/bss84lt1-d-16335336.pdf?src-supplier=Future+Electronics, ComponentLink8Description=https://datasheet.ciiva.com/6380/bss84lt1-d-6380649.pdf?src-supplier=Digi-Key, ComponentLink8URL=https://datasheet.ciiva.com/6380/bss84lt1-d-6380649.pdf?src-supplier=Digi-Key, ComponentLink9Description=https://datasheet.ciiva.com/11168/bss84lt1-d-11168266.pdf?src-supplier=Avnet, ComponentLink9URL=https://datasheet.ciiva.com/11168/bss84lt1-d-11168266.pdf?src-supplier=Avnet, ComponentLink10Description=https://datasheet.ciiva.com/6380/bss84lt1-d-6380651.pdf?src-supplier=Digi-Key, ComponentLink10URL=https://datasheet.ciiva.com/6380/bss84lt1-d-6380651.pdf?src-supplier=Digi-Key, ComponentLink11Description=https://datasheet.ciiva.com/6380/bss84lt1-d-6380652.pdf?src-supplier=Digi-Key, ComponentLink11URL=https://datasheet.ciiva.com/6380/bss84lt1-d-6380652.pdf?src-supplier=Digi-Key, ComponentLink12Description=https://datasheet.ciiva.com/8115/bss84lt1-d-8115421.pdf?src-supplier=Avnet, ComponentLink12URL=https://datasheet.ciiva.com/8115/bss84lt1-d-8115421.pdf?src-supplier=Avnet, Contact Plating=Tin,Matte, Drain to Source Voltage (Vdss)=50V, Element Configuration=Single, Fall Time=1ns, Halogen Free="Halogen Free", Height=0.04inch, Lead Free="Lead Free", Length=0.119inch, Manufacturer Part Number=BSS84LT1G, Nominal Vgs=2V, Number of Elements=1, Number of Pins=3, On-State Resistance=10R, Packaging="Tape and Reel", Power Dissipation=225mW, Pricing 1="1=0,290000, 10=0,195000, 50=0,195000, 100=0,080000, 1000=0,057000, 10000=0,036000 (USD)", Radiation Hardening=No, Rds On Max=10R, REACH SVHC="No SVHC", Rise Time=1ns, RoHS=Yes, Stock 1=957, Supplier 1=Mouser, Turn-Off Delay Time=16ns, Turn-On Delay Time=3.6ns, Width=0.055inch
R1 R42: library part RC0603JR-130RL, "YAGEO - RC0603JR-130RL - RES, THICK FILM, 0R, 0.1W, 0603", Case Code (Imperial)=0603, Case Code (Metric)=1608, Manufacturer=Yageo, Max Operating Temperature=155°C, Min Operating Temperature=-55°C, Package Quantity=5000, Power Rating=100mW, Resistance=0mR, Resistor Type="Thick Film", Supplier Part Number 1=603-RC0603JR-130RL, Temperature Coefficient=200ppm/°C, Tolerance=1%, Voltage Rating=50V, Case/Package=0603, Category="Chip SMD Resistors", ComponentLink1Description=https://datasheet.ciiva.com/7983/443971-7983749.pdf?src-supplier=Element14, ComponentLink1URL=https://datasheet.ciiva.com/7983/443971-7983749.pdf?src-supplier=Element14, ComponentLink2Description=https://datasheet.ciiva.com/46395/443971-46395125.pdf?src-supplier=Element14, ComponentLink2URL=https://datasheet.ciiva.com/46395/443971-46395125.pdf?src-supplier=Element14, Construction=Rectangular, Contact Plating=Tin,Matte, Depth=0.8mm, Height=0.45mm, Lead Free="Lead Free", Length=1.6mm, Manufacturer Part Number=RC0603JR-130RL, Military Standard=Not, Number of Pins=2, Packaging="Tape and Reel", Pricing 1="1=0,10000, 10=0,01500, 50=0,01500, 100=0,00500, 1000=0,00500, 10000=0,00500 (USD)", Radiation Hardening=No, REACH SVHC="No SVHC", RoHS=Yes, RoHS Compliant=Yes, Series=RC, Size Code=0603, Stock 1=5989, Supplier 1=Mouser, Termination=SMD/SMT, Voltage Rating (DC)=50V, Width=0.8mm
R2: library part CR0402-FX-8872GLF, "Res Thick Film 0402 88.7K Ohm 1% 0.063W(1/16W) ±100ppm/C Molded SMD Paper Tape on Plastic Reel", Case Code (Imperial)=0402, Case Code (Metric)=1005, Manufacturer=Bourns, Max Operating Temperature=125°C, Max Power Dissipation=63mW, Min Operating Temperature=-55°C, Package Quantity=10000, Power Rating=62.5mW, Resistance=88.7kR, Resistor Type="Thick Film", Supplier Part Number 1=652-CR0402-FX8872GLF, Temperature Coefficient=100ppm/°C, Tolerance=1%, Voltage Rating=50V, Case/Package=0402, Category="Chip SMD Resistors", ComponentLink1Description=http://components.arrow.com/part/dataview/42912538S6478999N1506?src-supplier=Arrow+Electronics, ComponentLink1URL=http://components.arrow.com/part/dataview/42912538S6478999N1506?src-supplier=Arrow+Electronics, ComponentLink2Description=http://www.onlinecomponents.com/datasheet/cr0402-fx-8872glf.aspx?p=10743379&src-supplier=Onlinecomponents.com, ComponentLink2URL=http://www.onlinecomponents.com/datasheet/cr0402-fx-8872glf.aspx?p=10743379&src-supplier=Onlinecomponents.com, ComponentLink3Description=http://components.arrow.com/part/dataview/0323_00459309?src-supplier=Arrow+Europe, ComponentLink3URL=http://components.arrow.com/part/dataview/0323_00459309?src-supplier=Arrow+Europe, ComponentLink4Description=http://www.bourns.com/data/global/pdfs/CR0402.pdf?src-supplier=Mouser, ComponentLink4URL=http://www.bourns.com/data/global/pdfs/CR0402.pdf?src-supplier=Mouser, ComponentLink5Description=https://www.bourns.com/docs/Product-Datasheets/CR0402.pdf?src-supplier=Digi-Key, ComponentLink5URL=https://www.bourns.com/docs/Product-Datasheets/CR0402.pdf?src-supplier=Digi-Key, ComponentLink6Description=http://www.bourns.com/pdfs/CR0402.pdf?src-supplier=Avnet, ComponentLink6URL=http://www.bourns.com/pdfs/CR0402.pdf?src-supplier=Avnet, Construction=Rectangular, Contact Plating=Tin, Depth=0.5mm, Height=0.35mm, Length=1mm, Manufacturer Part Number=CR0402-FX-8872GLF, Military Standard=Not, Mount="Surface Mount", Number of Terminations=2, Packaging="Tape and Reel", Pricing 1="1=0,10000, 10=0,02200, 50=0,02200, 100=0,01300, 1000=0,00800, 10000=0,00500 (USD)", Radiation Hardening=No, RoHS=Yes, RoHS Compliant=Yes, Series=CR0402, Stock 1=54661, Supplier 1=Mouser, Termination=SMD/SMT, Thickness=356um, Width=0.5mm
R3: library part CRCW04026M80FKED, "VISHAY         CRCW04026M80FKED            SMD Chip Resistor, Thick Film, AEC-Q200 CRCW Series, 6.8 Mohm, 50 V, 0402 [1005 Metric], 63 mW", Case Code (Imperial)=0402, Case Code (Metric)=1005, Manufacturer=Vishay, Max Operating Temperature=155°C, Max Power Dissipation=63mW, Min Operating Temperature=-55°C, Package Quantity=10000, Resistance=6.8MR, Resistance Tolerance=1%, Resistor Type="Thick Film", Supplier Part Number 1=71-CRCW04026M80FKED, Temperature Coefficient=100ppm/°C, Voltage Rating=50V, Case/Package=0402, Category="Chip SMD Resistors", ComponentLink1Description=https://datasheet.ciiva.com/2556/dcrcwe3-2556851.pdf?src-supplier=Digi-Key, ComponentLink1URL=https://datasheet.ciiva.com/2556/dcrcwe3-2556851.pdf?src-supplier=Digi-Key, ComponentLink2Description=https://datasheet.ciiva.com/22682/1700796-22682661.pdf?src-supplier=Element14, ComponentLink2URL=https://datasheet.ciiva.com/22682/1700796-22682661.pdf?src-supplier=Element14, ComponentLink3Description=https://datasheet.ciiva.com/5544/dcrcwe3-109170-5544312.pdf?src-supplier=Mouser, ComponentLink3URL=https://datasheet.ciiva.com/5544/dcrcwe3-109170-5544312.pdf?src-supplier=Mouser, ComponentLink4Description=https://datasheet.ciiva.com/7748/1697337-7748637.pdf?src-supplier=Element14, ComponentLink4URL=https://datasheet.ciiva.com/7748/1697337-7748637.pdf?src-supplier=Element14, ComponentLink5Description=https://datasheet.ciiva.com/7748/1697337-7748638.pdf?src-supplier=Element14, ComponentLink5URL=https://datasheet.ciiva.com/7748/1697337-7748638.pdf?src-supplier=Element14, ComponentLink6Description=https://datasheet.ciiva.com/22702/1697337-22702703.pdf?src-supplier=Element14, ComponentLink6URL=https://datasheet.ciiva.com/22702/1697337-22702703.pdf?src-supplier=Element14, Construction=Rectangular, Depth=0.5mm, Features="Automotive AEC-Q200", Height=0.016inch, Lead Free="Lead Free", Length=1mm, Manufacturer Part Number=CRCW04026M80FKED, Military Standard=Not, Number of Terminations=2, Packaging="Tape and Reel", Power Rating=63mW, Pricing 1="1=0,10000, 10=0,03300, 50=0,03300, 100=0,01400, 1000=0,01300, 10000=0,01000 (USD)", REACH SVHC=Unknown, RoHS=Yes, RoHS Compliant=Yes, Series=CRCW, Stock 1=37640, Supplier 1=Mouser, Termination=SMD/SMT, Tolerance=1%, Voltage Rating (DC)=50V, Weight=2.3E-05oz, Width=0.02inch
R4: library part CR0402-FX-1872GLF, "RES SMD 18.7K OHM 1% 1/16W 0402", Case Code (Imperial)=0402, Case Code (Metric)=1005, Manufacturer=Bourns, Max Operating Temperature=125°C, Max Power Dissipation=63mW, Min Operating Temperature=-55°C, Package Quantity=10000, Power Rating=62.5mW, Resistance=18.7kR, Resistor Type="Thick Film", Supplier Part Number 1=652-CR0402-FX1872GLF, Temperature Coefficient=100ppm/°C, Tolerance=1%, Voltage Rating=50V, Case/Package=0402, Category="Chip SMD Resistors", ComponentLink1Description=http://components.arrow.com/part/dataview/41911102S5605434N1506?src-supplier=Arrow+Electronics, ComponentLink1URL=http://components.arrow.com/part/dataview/41911102S5605434N1506?src-supplier=Arrow+Electronics, ComponentLink2Description=http://www.onlinecomponents.com/datasheet/cr0402-fx-1872glf.aspx?p=10742862&src-supplier=Onlinecomponents.com, ComponentLink2URL=http://www.onlinecomponents.com/datasheet/cr0402-fx-1872glf.aspx?p=10742862&src-supplier=Onlinecomponents.com, ComponentLink3Description=http://www.bourns.com/pdfs/CR0402.pdf?src-supplier=Avnet, ComponentLink3URL=http://www.bourns.com/pdfs/CR0402.pdf?src-supplier=Avnet, ComponentLink4Description=http://www.bourns.com/data/global/pdfs/CR0402.pdf?src-supplier=Mouser, ComponentLink4URL=http://www.bourns.com/data/global/pdfs/CR0402.pdf?src-supplier=Mouser, ComponentLink5Description=https://www.bourns.com/docs/Product-Datasheets/CR0402.pdf?src-supplier=Digi-Key, ComponentLink5URL=https://www.bourns.com/docs/Product-Datasheets/CR0402.pdf?src-supplier=Digi-Key, Contact Plating=Tin, Height=0.35mm, Length=1mm, Manufacturer Part Number=CR0402-FX-1872GLF, Mount="Surface Mount", Number of Terminations=2, Packaging="Tape and Reel", Pricing 1="1=0,12000, 10=0,02600, 50=0,02600, 100=0,01500, 1000=0,01000, 10000=0,00600 (USD)", Radiation Hardening=No, RoHS=Yes, RoHS Compliant=Yes, Series=CR0402, Stock 1=45190, Supplier 1=Mouser, Termination=SMD/SMT, Thickness=356um, Width=0.5mm
R5: library part AC0402FR-071M3L, "RES SMD 1.3M OHM 1% 1/16W 0402", Case/Package=0402, Manufacturer=Yageo, Max Operating Temperature=155°C, Max Power Dissipation=63mW, Min Operating Temperature=-55°C, Resistance=1.3MR, Resistor Type="Thick Film", Supplier Part Number 1=603-AC0402FR-071M3L, Temperature Coefficient=100ppm/°C, Tolerance=1%, Category="Chip SMD Resistors", ComponentLink1Description=http://www.yageo.com/NewPortal/yageodocoutput?fileName=/pdf/R-Chip/PYu-AC_51_RoHS_L_6.pdf&src-supplier=Digi-Key, ComponentLink1URL=http://www.yageo.com/NewPortal/yageodocoutput?fileName=/pdf/R-Chip/PYu-AC_51_RoHS_L_6.pdf&src-supplier=Digi-Key, Features="Moisture Resistant,Automotive AEC-Q200", Height=0.015inch, Length=0.039inch, Manufacturer Part Number=AC0402FR-071M3L, Number of Terminations=2, Packaging="Tape and Reel", Pricing 1="1=0,10000, 10=0,01700, 50=0,01700, 100=0,00600, 1000=0,00500, 10000=0,00300 (USD)", RoHS=Yes, RoHS Compliant=Yes, Stock 1=49532, Supplier 1=Mouser, Width=0.02inch
R6: library part CRCW040222K1FKED, "Resistor;  Thick Film;  22.1 Kilohms;  0.063 W;  1%;  SMT;  0402;  TCR 37 ppm/DegC;  TR", Case Code (Imperial)=0402, Case Code (Metric)=1005, Manufacturer=Vishay, Max Operating Temperature=155°C, Max Power Dissipation=63mW, Min Operating Temperature=-55°C, Package Quantity=10000, Resistance=22.1kR, Resistance Tolerance=1%, Resistor Type="Thick Film", Supplier Part Number 1=71-CRCW0402-22.1K-E3, Temperature Coefficient=100ppm/°C, Voltage Rating=50V, Case/Package=0402, Category="Chip SMD Resistors", ComponentLink1Description=https://datasheet.ciiva.com/11810/0900766b80d98824-11810184.pdf?src-supplier=RSComponents, ComponentLink1URL=https://datasheet.ciiva.com/11810/0900766b80d98824-11810184.pdf?src-supplier=RSComponents, ComponentLink2Description=https://datasheet.ciiva.com/7673/1697337-7673445.pdf?src-supplier=Element14, ComponentLink2URL=https://datasheet.ciiva.com/7673/1697337-7673445.pdf?src-supplier=Element14, ComponentLink3Description=https://datasheet.ciiva.com/3256/dcrcwe3-3256246.pdf?src-supplier=Avnet, ComponentLink3URL=https://datasheet.ciiva.com/3256/dcrcwe3-3256246.pdf?src-supplier=Avnet, ComponentLink4Description=https://datasheet.ciiva.com/3256/dcrcwe3-3256247.pdf?src-supplier=Avnet, ComponentLink4URL=https://datasheet.ciiva.com/3256/dcrcwe3-3256247.pdf?src-supplier=Avnet, ComponentLink5Description=https://datasheet.ciiva.com/16208/dcrcwe3-16208744.pdf?src-supplier=Future+Electronics, ComponentLink5URL=https://datasheet.ciiva.com/16208/dcrcwe3-16208744.pdf?src-supplier=Future+Electronics, ComponentLink6Description=https://datasheet.ciiva.com/22871/70201119-22871080.pdf?src-supplier=Allied+Electronics, ComponentLink6URL=https://datasheet.ciiva.com/22871/70201119-22871080.pdf?src-supplier=Allied+Electronics, ComponentLink7Description=https://datasheet.ciiva.com/16886/dcrcwe3-16886652.pdf?src-supplier=Avnet+Europe, ComponentLink7URL=https://datasheet.ciiva.com/16886/dcrcwe3-16886652.pdf?src-supplier=Avnet+Europe, ComponentLink8Description=https://datasheet.ciiva.com/7673/1697337-7673245.pdf?src-supplier=Element14, ComponentLink8URL=https://datasheet.ciiva.com/7673/1697337-7673245.pdf?src-supplier=Element14, ComponentLink9Description=https://datasheet.ciiva.com/16771/70201119-16771838.pdf?src-supplier=Allied+Electronics, ComponentLink9URL=https://datasheet.ciiva.com/16771/70201119-16771838.pdf?src-supplier=Allied+Electronics, Construction=Rectangular, Contact Plating=Tin, Depth=0.5mm, Features="Automotive AEC-Q200", Height=0.35mm, Lead Free="Lead Free", Length=1mm, Manufacturer Part Number=CRCW040222K1FKED, Military Standard=Not, Mount="Surface Mount", Number of Pins=2, Number of Terminations=2, Packaging="Tape and Reel", Power Rating=63mW, Pricing 1="1=0,10000, 10=0,03300, 50=0,03300, 100=0,01400, 1000=0,00500, 10000=0,00500 (USD)", Radiation Hardening=No, REACH SVHC=Unknown, RoHS=Yes, RoHS Compliant=Yes, Series=CRCW, Stock 1=53617, Supplier 1=Mouser, Technology="THICK FILM", Termination=SMD/SMT, Tolerance=1%, Voltage Rating (DC)=50V, Weight=2.3E-05oz, Width=0.5mm, Working Voltage=50V